# EAGLE board Display de vidas y nivel (EAGLE 7.5.0)
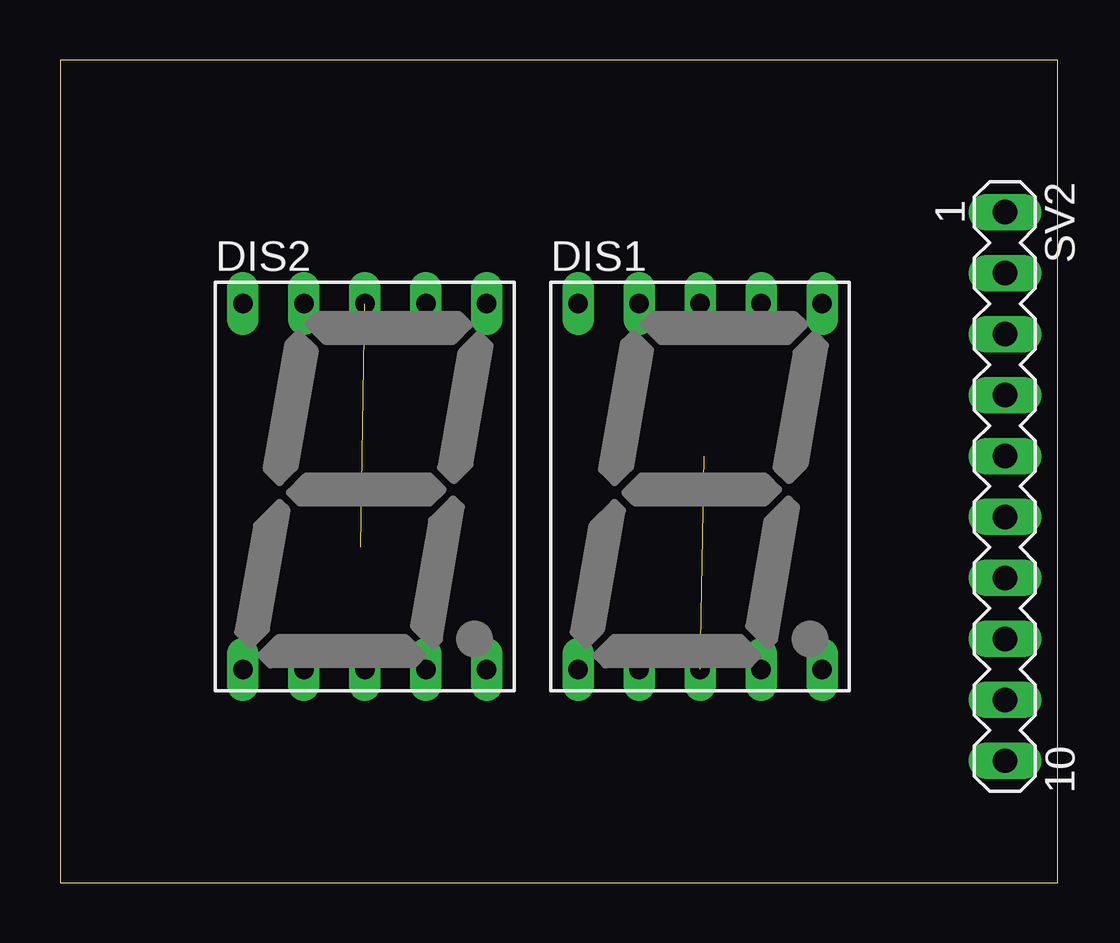
[diagram p0: board, top side]
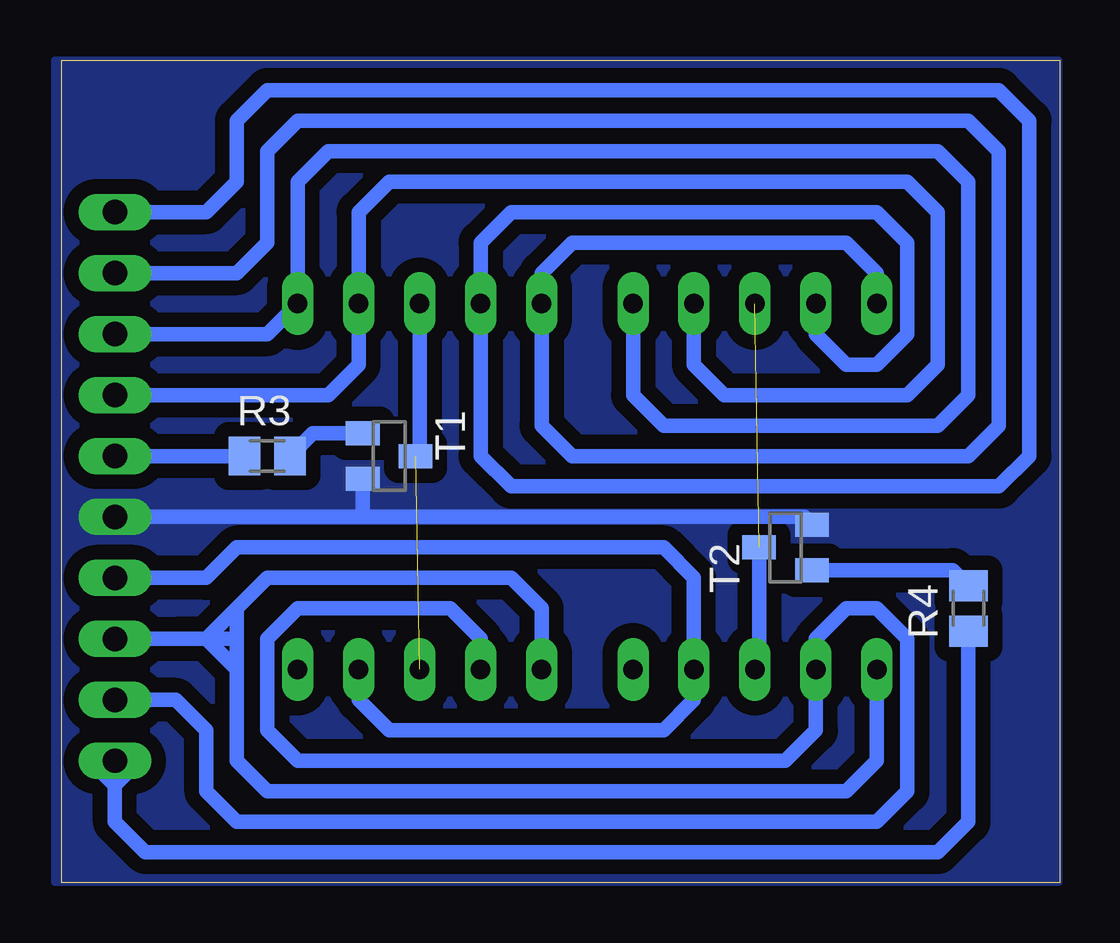
[diagram p1: board, bottom side, seen from below]

Size 41.58 x 34.28 mm. Coordinates in mm from the lower left corner, seen from the top.
Outline: 0,0 41.58,0 41.58,34.28 0,34.28 0,0
Copper layers (1*16): Top 0.035mm / dielectric 1.5mm / Bottom 0.035mm
Design rules "default *": minimum track width 10mil, minimum drill 24mil, track to track 8mil, track to pad 8mil, pad to pad 8mil, via to via 8mil, smd to smd 8mil, copper to edge 0mil, drill to drill 8mil, minimum pad ring 10mil, minimum via ring 8mil, stop-mask expansion 4mil, vias tented up to drill 0mil, thermal gap 10mil

## Footprints (pad centres in the part's own frame; a part is rotated, then mirrored left to right if it is on the bottom)
HDSP-M = drill 0.813 long: 1 -5.08,-7.62; 2 -2.54,-7.62; 3 0,-7.62; 4 2.54,-7.62; 5 5.08,-7.62; 6 5.08,7.62; 7 2.54,7.62; 8 0,7.62; 9 -2.54,7.62; 10 -5.08,7.62
M0805 = smd 1.3 x 1.6: 1 -0.95,0; 2 0.95,0
MA10-1 = drill 1.016 long: 1 -11.43,0; 2 -8.89,0; 3 -6.35,0; 4 -3.81,0; 5 -1.27,0; 6 1.27,0; 7 3.81,0; 8 6.35,0; 9 8.89,0; 10 11.43,0
SOT23 = smd 1 x 1.4: 1 -0.95,-1.1; 2 0.95,-1.1; 3 0,1.1

## Placement (x,y rotation side)
DIS1  HD-H101  [HDSP-M]  26.67,16.51 0 top
DIS2  HD-H101  [HDSP-M]  12.7,16.51 0 top
R3  [M0805]  33.02,17.78 0 bottom
R4  [M0805]  3.81,11.43 90 bottom
SV2  [MA10-1]  39.37,16.51 270 top
T1  BC848  [SOT23]  27.94,17.78 270 bottom
T2  BC848  [SOT23]  11.43,13.97 90 bottom

## Library data of the parts
DIS1 DIS2 = display-hp; OC_FARNELL: unknown; OC_NEWARK: unknown
R3 R4 = rcl
SV2 = con-lstb; OC_FARNELL: unknown; OC_NEWARK: unknown
T1 T2 = transistor

## Nets
GND: SV2.6 T1.2 T2.2
N$1: R3.2 T1.1
N$2: DIS1.6 DIS2.6 SV2.3
N$3: DIS1.4 DIS2.4 SV2.7
N$4: DIS1.2 DIS2.2 SV2.9
N$5: DIS1.1 DIS2.1 SV2.8
N$6: DIS1.9 DIS2.9 SV2.1
N$7: DIS1.10 DIS2.10 SV2.2
N$8: DIS1.3 DIS1.8 T1.3
N$9: DIS2.3 DIS2.8 T2.3
N$10: R3.1 SV2.5
N$12: R4.2 T2.1
N$13: DIS1.7 DIS2.7 SV2.4
N$17: R4.1 SV2.10

## Tracks (layer width: path | path; a pad name or v marks a point on that pad's centre or on a via)
GND
  Bottom 0.61: SV2.6 29.21,15.24 | 29.21,15.24 10.65,15.24 T2.2 | T1.2 29.04,15.41 29.21,15.24
  pour Bottom (isolate 0.61, no thermals): 0,34.29 41.91,34.29 41.91,0 0,0
N$1
  Bottom 0.61: T1.1 31.12,18.73 R3.2
N$2
  Bottom 0.61: DIS2.6 17.78,20.32 16.51,19.05 5.08,19.05 3.81,20.32 3.81,29.21 5.08,30.48 30.48,30.48 31.75,29.21 DIS1.6 33.02,22.86 SV2.3
N$3
  Bottom 0.61: DIS1.4 29.21,7.62 27.94,6.35 16.51,6.35 15.24,7.62 DIS2.4 15.24,12.7 16.51,13.97 34.29,13.97 35.56,12.7 SV2.7
N$4
  Bottom 0.61: DIS1.2 24.13,10.16 25.4,11.43 31.75,11.43 33.02,10.16 33.02,6.35 31.75,5.08 11.43,5.08 10.16,6.35 DIS2.2 10.16,10.16 8.89,11.43 7.62,11.43 6.35,10.16 6.35,3.81 7.62,2.54 34.29,2.54 35.56,3.81 35.56,6.35 36.83,7.62 SV2.9
N$5
  Bottom 0.61: DIS1.1 21.59,11.43 22.86,12.7 33.02,12.7 34.29,11.43 | 34.29,10.16 34.29,8.89 | 34.29,8.89 34.29,5.08 33.02,3.81 8.89,3.81 7.62,5.08 DIS2.1 | SV2.8 35.56,10.16 | 35.56,10.16 34.29,10.16 | 35.56,10.16 34.29,8.89 | 34.29,10.16 34.29,11.43 | 34.29,11.43 35.56,10.16
N$6
  Bottom 0.61: DIS2.9 10.16,22.86 8.89,21.59 7.62,21.59 6.35,22.86 6.35,26.67 7.62,27.94 22.86,27.94 24.13,26.67 DIS1.9 24.13,17.78 22.86,16.51 2.54,16.51 1.27,17.78 1.27,31.75 2.54,33.02 33.02,33.02 34.29,31.75 34.29,29.21 35.56,27.94 SV2.1
N$7
  Bottom 0.61: DIS2.10 7.62,25.4 8.89,26.67 20.32,26.67 21.59,25.4 DIS1.10 21.59,19.05 20.32,17.78 3.81,17.78 2.54,19.05 2.54,30.48 3.81,31.75 31.75,31.75 33.02,30.48 33.02,26.67 34.29,25.4 SV2.2
N$8  (1 unrouted)
  Bottom 0.61: DIS1.8 26.67,17.95 T1.3 26.67,17.78
N$9  (1 unrouted)
  Bottom 0.61: T2.3 12.53,9.06 DIS2.3
N$10
  Bottom 0.61: R3.1 SV2.5
N$12
  Bottom 0.61: T2.1 4.45,13.02 R4.2
N$13
  Bottom 0.61: DIS2.7 15.24,21.59 13.97,20.32 6.35,20.32 5.08,21.59 5.08,27.94 6.35,29.21 27.94,29.21 29.21,27.94 DIS1.7 29.21,21.59 30.48,20.32 SV2.4
N$16
  Bottom 0.61: 35.56,10.16 36.83,10.16
N$17
  Bottom 0.254: 40.64,5.08 39.37,3.81 38.1,5.08
  Bottom 0.61: R4.1 3.81,2.54 5.08,1.27 38.1,1.27 39.37,2.54 39.37,3.81 SV2.10